# Altium PCB MUX 32_1 2019_2022-11-04.pcbdoc
Units mil, origin at the board's own origin, x right, y up, seen from the top; angles counter-clockwise.
Board outline 7215 x 2415 mil, 2 copper layers (Top Layer, Bottom Layer); 7 components, 40 nets, 102 pads, 24 vias.
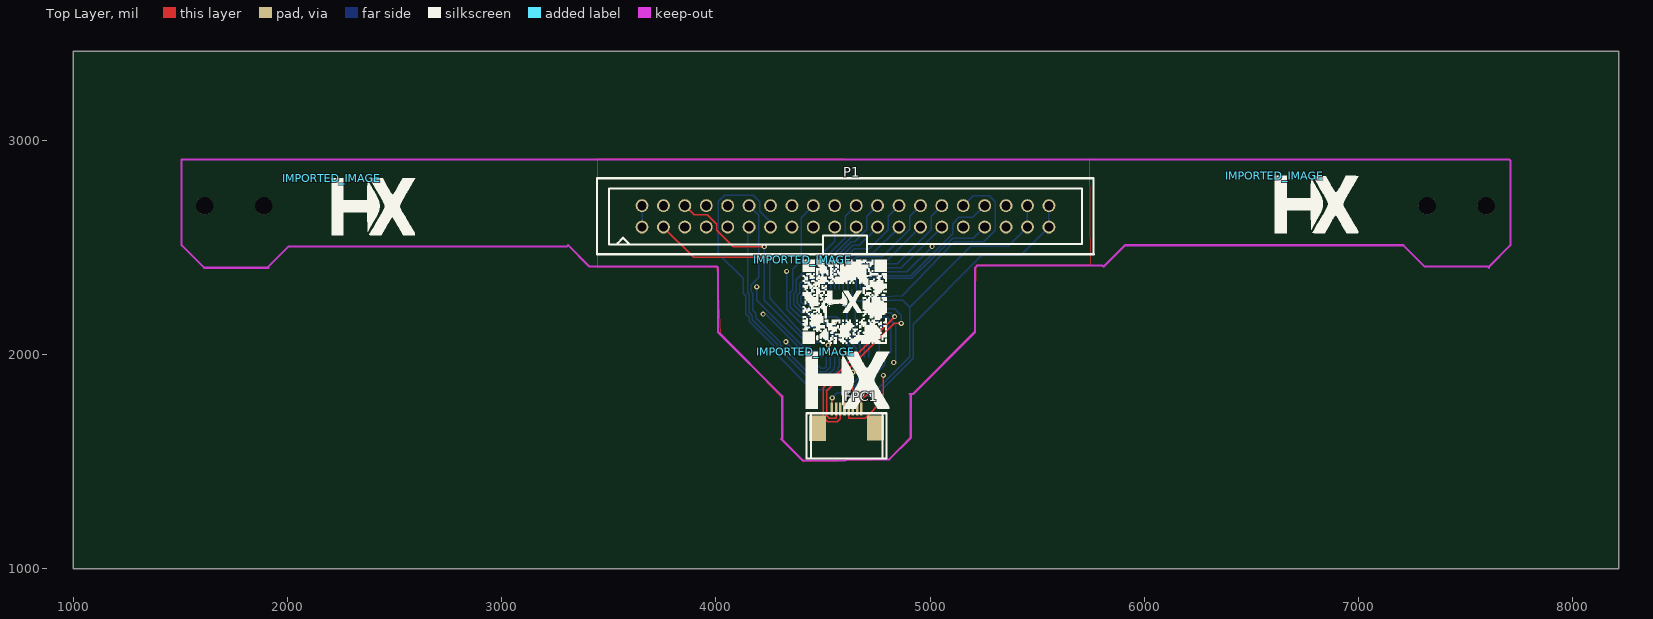
[diagram p0: Top Layer view]
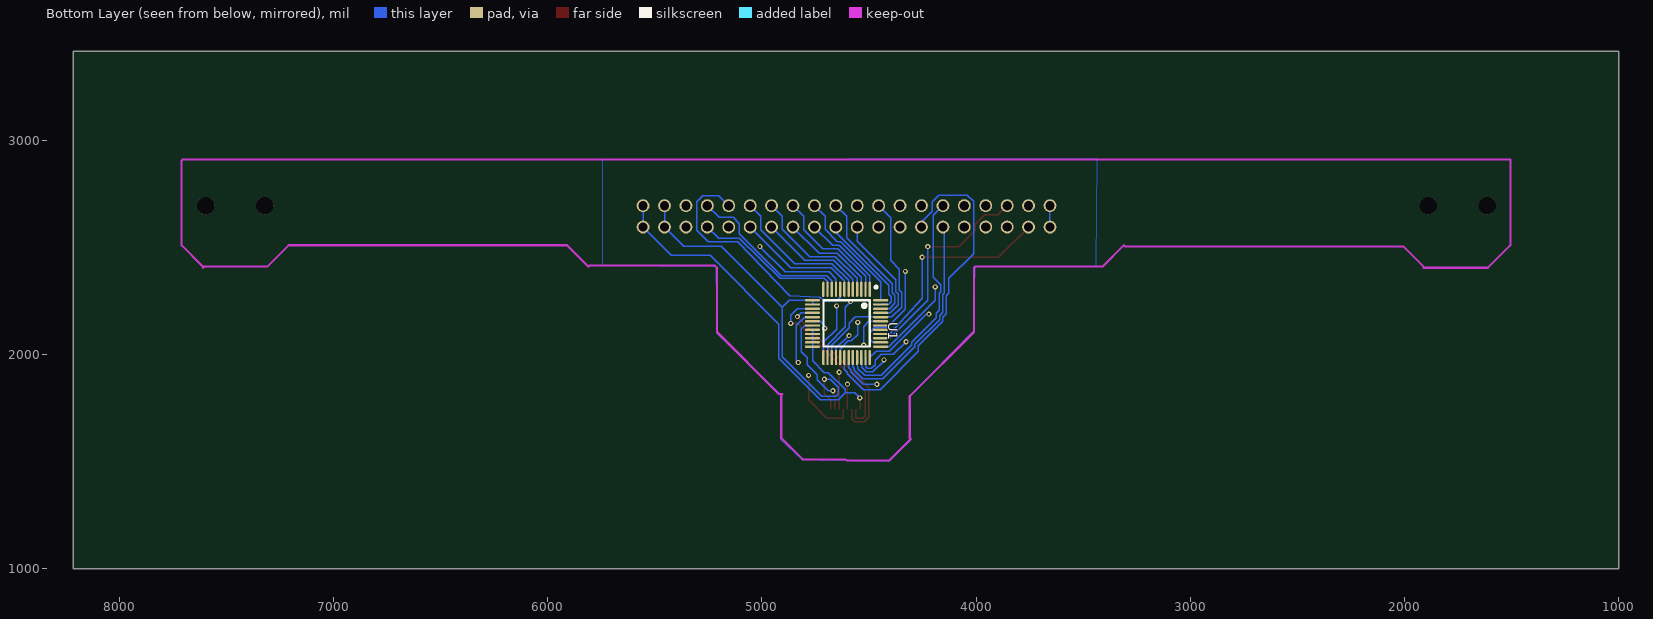
[diagram p1: Bottom Layer view, seen from below]

## Layer stack, top to bottom
Top Layer: signal copper (thickness not stored)
Dielectric: dielectric 12.6, FR-4, Dk 4.8
Bottom Layer: signal copper (thickness not stored)

## Board outline
8215,1000 1000,1000 1000,3415 8215,3415

## Components (designator, comment, footprint, x,y, rotation, side; value= is the part's Value field where it differs from the comment)
FPC1 "FH34SRJ-8S-0.5SH(50)" FPC-0.5MM-LSSJ-H2.0-8P 4580,1645 r0 top
IMPORTED_IMAGE "IMPORTED_IMAGE" IMPORTED_IMAGE 4420,2013.71 r0 top
IMPORTED_IMAGE "IMPORTED_IMAGE" IMPORTED_IMAGE 4405,2442.91 r0 top
IMPORTED_IMAGE "IMPORTED_IMAGE" IMPORTED_IMAGE 6610,2833.71 r0 top
IMPORTED_IMAGE "IMPORTED_IMAGE" IMPORTED_IMAGE 2205,2823.71 r0 top
P1 "HDR-IDC-2.54-2X20P" HDR-IDC-2.54-2X20P 4605,2645 r0 top
U1 "ADG732BSUZ-REEL" TQFP-48_7X7X05P 4605,2145 r90 bottom

## Footprints (in the part's own frame and the unit in brackets; to place one, negate y for a bottom-side part, rotate by r counter-clockwise, add the part's x,y. Pads: shape width x height; smd on the part's side, far side on the other; paste and mask are expansions set on the pad)
FPC-0.5MM-LSSJ-H2.0-8P [mm]
  rect 0.3x1.5 smd: 1(2.519,2.542) 2(2.02,2.542) 3(1.52,2.542) 4(1.02,2.542) 5(0.52,2.542) 6(0.02,2.542) 7(-0.48,2.542) 8(-0.98,2.542)
  rect 2x3 smd: 9(-2.666,0.282) 10(4.195,0.288)
  silkscreen extent -4,-3.31 5.52,2.04
HDR-IDC-2.54-2X20P [mil]
  round 60 hole 43.3: 1(-950,-50) 2(-950,50) 3(-850,-50) 4(-850,50) 5(-750,-50) 6(-750,50) 7(-650,-50) 8(-650,50) 9(-550,-50) 10(-550,50) 11(-450,-50) 12(-450,50) 13(-350,-50) 14(-350,50) 15(-250,-50) 16(-250,50) 17(-150,-50) 18(-150,50) 19(-50,-50) 20(-50,50) 21(50,-50) 22(50,50) 23(150,-50) 24(150,50) 25(250,-50) 26(250,50) 27(350,-50) 28(350,50) 29(450,-50) 30(450,50) 31(550,-50) 32(550,50) 33(650,-50) 34(650,50) 35(750,-50) 36(750,50) 37(850,-50) 38(850,50) 39(950,-50) 40(950,50)
  silkscreen extent -1161,-177 1160,178
IMPORTED_IMAGE [mil]
  silkscreen extent 0,-268 390,0
TQFP-48_7X7X05P [mm]
  oval 1.8x0.28 smd: 1(4.05,-2.75) 2(4.05,-2.25) 3(4.05,-1.75) 4(4.05,-1.25) 5(4.05,-0.75) 6(4.05,-0.25) 7(4.05,0.25) 8(4.05,0.75) 9(4.05,1.25) 10(4.05,1.75) 11(4.05,2.25) 12(4.05,2.75) 25(-4.05,2.75) 26(-4.05,2.25) 27(-4.05,1.75) 28(-4.05,1.25) 29(-4.05,0.75) 30(-4.05,0.25) 31(-4.05,-0.25) 32(-4.05,-0.75) 33(-4.05,-1.25) 34(-4.05,-1.75) 35(-4.05,-2.25) 36(-4.05,-2.75)
  oval 0.28x1.8 smd: 13(2.75,4.05) 14(2.25,4.05) 15(1.75,4.05) 16(1.25,4.05) 17(0.75,4.05) 18(0.25,4.05) 19(-0.25,4.05) 20(-0.75,4.05) 21(-1.25,4.05) 22(-1.75,4.05) 23(-2.25,4.05) 24(-2.75,4.05) 37(-2.75,-4.05) 38(-2.25,-4.05) 39(-1.75,-4.05) 40(-1.25,-4.05) 41(-0.75,-4.05) 42(-0.25,-4.05) 43(0.25,-4.05) 44(0.75,-4.05) 45(1.25,-4.05) 46(1.75,-4.05) 47(2.25,-4.05) 48(2.75,-4.05)
  silkscreen extent -2.75,-3.65 4.45,2.75

## Free pads (board coordinates)
  round 80 hole 80 unplated: ""(1612.87,2694.25) ""(1888.47,2694.25) ""(7321.54,2694.25) ""(7597.13,2694.25)

## Via types
v1: diameter 24, hole 12, Top Layer to Bottom Layer, tented both sides, 24 vias

## Nets (pads, with @x,y where several pads share a name; then routed paths per layer and width w, separated by ;. In a path a pad name is that pad's centre, name@x,y a point inside that pad or via, vN(x,y) a via of type N, cw(c..) or ccw(c..) an arc to the next point about the centre after c; other vN are vias at no path point)
GND: FPC1.8 P1.1 P1.2 P1.39 P1.40 U1.20 U1.21 U1.22 U1.23 U1.24 | length 4022.3
  Top Layer w6: FPC1.8 4541.4,1795.5 v1(4543.4,1797.5)
  Mid-Layer 1 w6: P1.2 3701.5,2741.5 5508.5,2741.5 P1.40
  Bottom Layer w6: P1.1 P1.2 ; v1(4543.4,1797.5) 4566.2,1820.2 4611.9,1820.2 ; U1.20@4763.9,2115.4 4763.9,2095.8 4763.9,2076.1 4763.9,2056.4 4763.9,2036.7 4763.9,1971.2 4708,1915.3 4689.4,1915.3 4611.9,1837.8 4611.9,1820.2 ; P1.40 P1.39 5422.8,2462.8 5242,2462.8 4920.6,2141.4 4920.6,1982.2 4726.8,1788.4 4643.7,1788.4 4611.9,1820.2
S$63746: 
U1_1: P1.23 U1.1 | length 415
  Bottom Layer w6: U1.1@4496.8,2305 4496.8,2367.6 4639.6,2510.5 4670.5,2510.5 P1.23
U1_2: P1.26 U1.2 | length 570.9
  Bottom Layer w6: U1.2@4516.4,2305 4516.4,2364.5 4646.3,2494.3 4715.7,2494.3 4805,2583.6 4805,2645 P1.26
U1_3: P1.25 U1.3 | length 472
  Bottom Layer w6: U1.3@4536.1,2305 4536.1,2361.3 4647.3,2472.5 4732.5,2472.5 P1.25
U1_4: P1.28 U1.4 | length 625.6
  Bottom Layer w6: U1.4@4555.8,2305 4555.8,2354.8 4657.4,2456.4 4777.4,2456.4 4905,2584 4905,2645 P1.28
U1_5: P1.27 U1.5 | length 526.2
  Bottom Layer w6: U1.5@4575.5,2305 4575.5,2350.3 4665.4,2440.3 4800.3,2440.3 P1.27
U1_6: P1.30 U1.6 | length 681.8
  Bottom Layer w6: U1.6@4595.2,2305 4595.2,2346.4 4672.9,2424.1 4845.9,2424.1 5005,2583.3 5005,2645 P1.30
U1_7: P1.29 U1.7 | length 582.7
  Bottom Layer w6: U1.7@4614.9,2305 4614.9,2343.3 4677.2,2405.6 4865.6,2405.6 P1.29
U1_8: P1.32 U1.8 | length 1163.6
  Bottom Layer w6: U1.8@4634.6,2305 4634.6,2266.6 4649.1,2252 4706.1,2252 4730.1,2268.3 4870,2275 5112.9,2526.2 5250.5,2526.2 5305,2580.7 5305,2714 5276.9,2742.1 5202.1,2742.1 P1.32
U1_9: P1.31 U1.9 | length 650
  Mid-Layer 2 w6: v1(5009.7,2504.2) 5064.2,2504.2 P1.31
  Bottom Layer w6: U1.9@4654.2,2305 4654.2,2354.7 4685.8,2386.3 4891.8,2386.3 v1(5009.7,2504.2)
U1_10: P1.34 U1.10 | length 793.5
  Bottom Layer w6: U1.10@4673.9,2305 4673.9,2344.9 4697.8,2368.8 4909.7,2368.8 5105,2564 5105,2610.9 5134.4,2640.3 5200.3,2640.3 P1.34
U1_11: P1.33 U1.11 | length 700.7
  Bottom Layer w6: U1.11 4693.58,2338.58 4710,2355 4915,2355 5106.2,2542.4 5202.4,2542.4 P1.33
U1_15: FPC1.7 U1.15 | length 837.8
  Top Layer w6: FPC1.7 4561.1,1702.5 4529.8,1702.5 4518,1714.2 4518,1830.9 4832.4,2145.4 v1(4865.8,2145.4)
  Bottom Layer w6: U1.15@4763.9,2213.9 4835.2,2213.9 4865.8,2183.3 v1(4865.8,2145.4)
U1_16: FPC1.6 U1.16 | length 823.9
  Top Layer w6: FPC1.6 4580.8,1702.5 4580.8,1699.3 4567.8,1686.3 4523.1,1686.3 4501.8,1707.5 4501.8,1844 v1(4834.6,2176.7)
  Bottom Layer w6: U1.16@4763.9,2194.2 4817,2194.2 v1(4834.6,2176.7)
U1_17: FPC1.5 U1.17 | length 657.8
  Top Layer w6: FPC1.5 v1(4600.5,1861.9)
  Mid-Layer 1 w6: v1(4600.5,1861.9) 4619.9,1861.9 4720.7,1962.6 v1(4830.7,1962.6)
  Bottom Layer w6: U1.17@4763.9,2174.5 4801.2,2174.5 4840,2135.7 4840,1971.9 v1(4830.7,1962.6)
U1_18: FPC1.4 U1.18 | length 762.4
  Top Layer w6: FPC1.4 4620.2,1702.5 4696.5,1702.5 4782.4,1788.4 v1(4782.4,1902.3)
  Mid-Layer 1 w6: v1(4706.7,2122.1) 4859.7,1969 4859.7,1953.3 4808.8,1902.3 v1(4782.4,1902.3)
  Bottom Layer w6: v1(4706.7,2122.1) 4706.7,2133.7 4727.7,2154.8 U1.18@4763.9,2154.8
U1_19: FPC1.2 U1.19 | length 511
  Top Layer w6: FPC1.2 4659.5,1821.2 v1(4668.8,1830.4)
  Bottom Layer w6: v1(4668.8,1830.4) 4689.7,1830.4 4742.1,1882.7 4742.1,1905.5 4789.4,1952.9 4789.4,1985.7 4816.5,2012.8 4816.5,2119.9 4801.2,2135.1 U1.19@4763.9,2135.1
U1_25: P1.20 U1.25 | length 774.5
  Mid-Layer 2 w6: P1.20 4608.1,2641.9 4608.1,2270.2 v1(4651.4,2226.9)
  Bottom Layer w6: v1(4651.4,2226.9) 4651.4,2118.3 4713.3,2056.4 U1.25@4713.3,1986.1
U1_26: P1.17 U1.26 | length 707.7
  Mid-Layer 2 w6: P1.17 4586,2464 v1(4586,2246.6)
  Bottom Layer w6: v1(4586,2246.6) 4610.9,2221.6 4610.9,2128.5 4693.6,2045.8 U1.26@4693.6,1986.1
U1_27: P1.18 U1.27 | length 989.1
  Bottom Layer w6: P1.18 4399.3,2639.3 4399.3,2439.3 4358.4,2398.4 4358.4,2300.7 4347.2,2289.5 4347.2,2221.2 4393.1,2175.3 4564.2,2175.3 4592.6,2146.8 4592.6,2124 4673.9,2042.7 U1.27@4673.9,1986.1
U1_28: P1.15 U1.28 | length 733.9
  Mid-Layer 1 w6: P1.15 4355,2432.7 4592.8,2194.9 v1(4592.8,2088.3)
  Bottom Layer w6: v1(4592.8,2088.3) 4594.6,2088.3 4654.2,2028.7 U1.28@4654.2,1986.1
U1_29: P1.16 U1.29 | length 832.6
  Mid-Layer 2 w6: P1.16 4405,2645 4405,2400.9 4552.8,2253.1 v1(4552.8,2149.7)
  Bottom Layer w6: v1(4552.8,2149.7) 4552.8,2092.8 4582.4,2063.2 4595.9,2063.2 4634.6,2024.5 U1.29@4634.6,1986.1
U1_30: P1.13 U1.30 | length 1682.3
  Bottom Layer w6: P1.13 4255,2617.8 4205,2667.8 4205,2713.4 4174.5,2743.9 4040.4,2743.9 4011.7,2715.1 4011.7,2470.7 4127.1,2355.3 4127.1,2285.4 4138.9,2273.6 4138.9,2189.6 4154.7,2173.8 4154.7,2154.8 4269.2,2040.3 4269.2,2014.4 4447.6,1836.1 4526.8,1836.1 4600.6,1909.9 4600.6,1917.5 4614.9,1931.8 U1.30@4614.9,1986.1
U1_31: P1.14 U1.31 | length 1137.1
  Mid-Layer 2 w6: P1.14 4310.7,2639.3 4310.7,2467.3 4463.3,2314.7 v1(4463.3,1861.2)
  Bottom Layer w6: v1(4463.3,1861.2) 4527.3,1861.2 4584.5,1918.4 4584.5,1927.9 4595.2,1938.5 U1.31@4595.2,1986.1
U1_32: P1.11 U1.32 | length 1042.2
  Bottom Layer w6: P1.11 4149.1,2589.1 4149.1,2286.2 4155,2280.3 4155,2196.2 4170.8,2180.5 4170.8,2161.5 4285.3,2046.9 4285.3,2036.7 4435.7,1886.3 4528.9,1886.3 4568.4,1925.7 4568.4,1935.9 4575.5,1943 U1.32@4575.5,1986.1
U1_33: P1.12 U1.33 | length 1115.6
  Bottom Layer w6: P1.12 4199.6,2650.4 4199.6,2359.9 4165.6,2325.8 4165.6,2292.5 4171.9,2286.3 4171.9,2206.4 4186.9,2191.4 4186.9,2170.6 4301.5,2056 4301.5,2044.6 4443.6,1902.4 4520.7,1902.4 4552.2,1934 4552.2,1945.1 4555.8,1948.7 U1.33@4555.8,1986.1
U1_34: P1.9 U1.34 | length 962.2
  Mid-Layer 2 w6: P1.9 4429.9,2220.1 v1(4429.9,1974.9)
  Bottom Layer w6: v1(4429.9,1974.9) 4429.9,1970.4 4481.8,1918.5 4514,1918.5 4535,1939.6 4535,1985 U1.34@4536.1,1986.1
U1_35: P1.10 U1.35 | length 1082.4
  Mid-Layer 2 w6: P1.10 4011.8,2651.8 4011.8,2577.2 4326.6,2262.5 v1(4326.6,2059.5)
  Bottom Layer w6: v1(4326.6,2059.5) 4386.1,2000 4442.1,2000 4470.1,1972 4470.1,1953.2 4488.7,1934.7 4507.3,1934.7 4516.4,1943.8 U1.35@4516.4,1986.1
U1_36: P1.7 U1.36 | length 876.7
  Mid-Layer 2 w6: P1.7 4220.3,2329.7 v1(4220.3,2188.5)
  Bottom Layer w6: v1(4220.3,2188.5) 4233.3,2188.5 4405.7,2016.1 4466.8,2016.1 U1.36@4496.8,1986.1
U1_37: P1.8 U1.37 | length 930.3
  Mid-Layer 2 w6: P1.8 3911.3,2651.2 3911.3,2576 4171.7,2315.5 v1(4190.8,2315.5)
  Bottom Layer w6: v1(4190.8,2315.5) 4190.8,2253.8 4407.9,2036.7 U1.37@4445,2036.7
U1_38: P1.5 U1.38 | length 1035.8
  Mid-Layer 1 w6: P1.5 4062.3,2387.7 v1(4330.1,2387.7)
  Bottom Layer w6: v1(4330.1,2387.7) 4330.1,2211.5 4415.2,2126.3 4472.3,2126.3 4494.1,2104.5 4494.1,2068.2 4482.3,2056.4 U1.38@4445,2056.4
U1_39: P1.6 U1.39 | length 1009.2
  Top Layer w6: P1.6 3898.1,2651.9 3960.5,2651.9 4005,2607.3 4005,2579.6 4080.7,2503.9 v1(4225.7,2503.9)
  Bottom Layer w6: v1(4225.7,2503.9) 4225.7,2253.7 4403.3,2076.1 U1.39@4445,2076.1
U1_40: P1.3 U1.40 | length 1013.5
  Top Layer w6: P1.3 3896.2,2453.8 v1(4252.1,2453.8)
  Bottom Layer w6: v1(4252.1,2453.8) 4252.1,2263.2 4405,2095 U1.40@4445,2095.8
U1_43: FPC1.3 U1.43 | length 522.7
  Top Layer w6: FPC1.3 v1(4639.8,1917.3)
  Mid-Layer 1 w6: v1(4524.8,2043.8) 4524.8,2032.3 v1(4639.8,1917.3)
  Bottom Layer w6: U1.43@4445,2154.8 4500.2,2154.8 4524.8,2130.2 v1(4524.8,2043.8)
U1_45: P1.19 U1.45 | length 539.7
  Bottom Layer w6: U1.45@4445,2194.2 4401.2,2194.2 4363.3,2232.1 4363.3,2282.8 4374.5,2294 4374.5,2349.2 4555,2529.7 P1.19
U1_46: P1.22 U1.46 | length 646.3
  Bottom Layer w6: U1.46@4445,2213.9 4404.3,2213.9 4379.4,2238.7 4379.4,2276.1 4390.6,2287.3 4390.6,2329.9 4605,2544.3 4605,2645 P1.22
U1_47: P1.21 U1.47 | length 510.5
  Bottom Layer w6: U1.47@4445,2233.6 4408.7,2233.6 4395.6,2246.7 4395.6,2269.4 4406.8,2280.6 4406.8,2323.2 4655,2571.5 P1.21
U1_48: P1.24 U1.48 | length 578.8
  Bottom Layer w6: U1.48@4445,2253.2 4445,2338.6 4633,2526.6 4647.7,2526.6 4705,2583.9 4705,2645 P1.24
VCC: FPC1.1 P1.4 P1.37 P1.38 U1.13 U1.14 | length 3553.7
  Top Layer w6: FPC1.1 4679.2,1787.7 4708.5,1817 v1(4708.5,1884.6)
  Mid-Layer 1 w6: P1.4 3798.8,2651.2 5411.3,2651.2 P1.38
  Bottom Layer w6: v1(4708.5,1884.6) 4681.5,1884.6 4643.1,1846.2 4643.1,1813.9 4651.9,1805.2 4720.8,1805.2 4904.5,1988.9 4904.5,2221 ; U1.14@4763.9,2233.6 4763.9,2253.2 4872.2,2253.2 4904.5,2221 ; P1.38 P1.37 5366.2,2506.1 5189.6,2506.1 4904.5,2221
pads on no net: FPC1.9 FPC1.10 P1.35 P1.36 U1.12 U1.41 U1.42 U1.44

## Polygon pours and split planes (outlines as drawn)
GND on Bottom Layer (solid): 5745,2905 5745,2420 5215,2410 5210,2100 4915,1815 4915,1605 4815,1510 4410,1500 4305,1600 4310,1805 4010,2110 4005,2410 3440,2415 3435,2915 5745,2910
GND on Top Layer (solid): 5745,2910 3445,2915 3445,2405 4005,2410 4020,2100 4305,1800 4310,1605 4410,1500 4810,1510 4910,1615 4915,1815 5210,2110 5215,2420 5740,2420 5750,2420

## Silkscreen, mask and mechanical layers (free items; w line width, h text height)
Document:
  lines w0.1: 4607.49,2207.49 4607.51,2207.51